# Altium PCB PADS_1.PcbDoc
Units mil, origin at the board's own origin, x right, y up, seen from the top; angles counter-clockwise.
Board outline 6102.36 x 3681.1 mil, 2 copper layers (Top Layer, Bottom Layer); 115 components, 68 nets, 289 pads, 69 vias.
Unrouted connection lines stored in the file: 1.
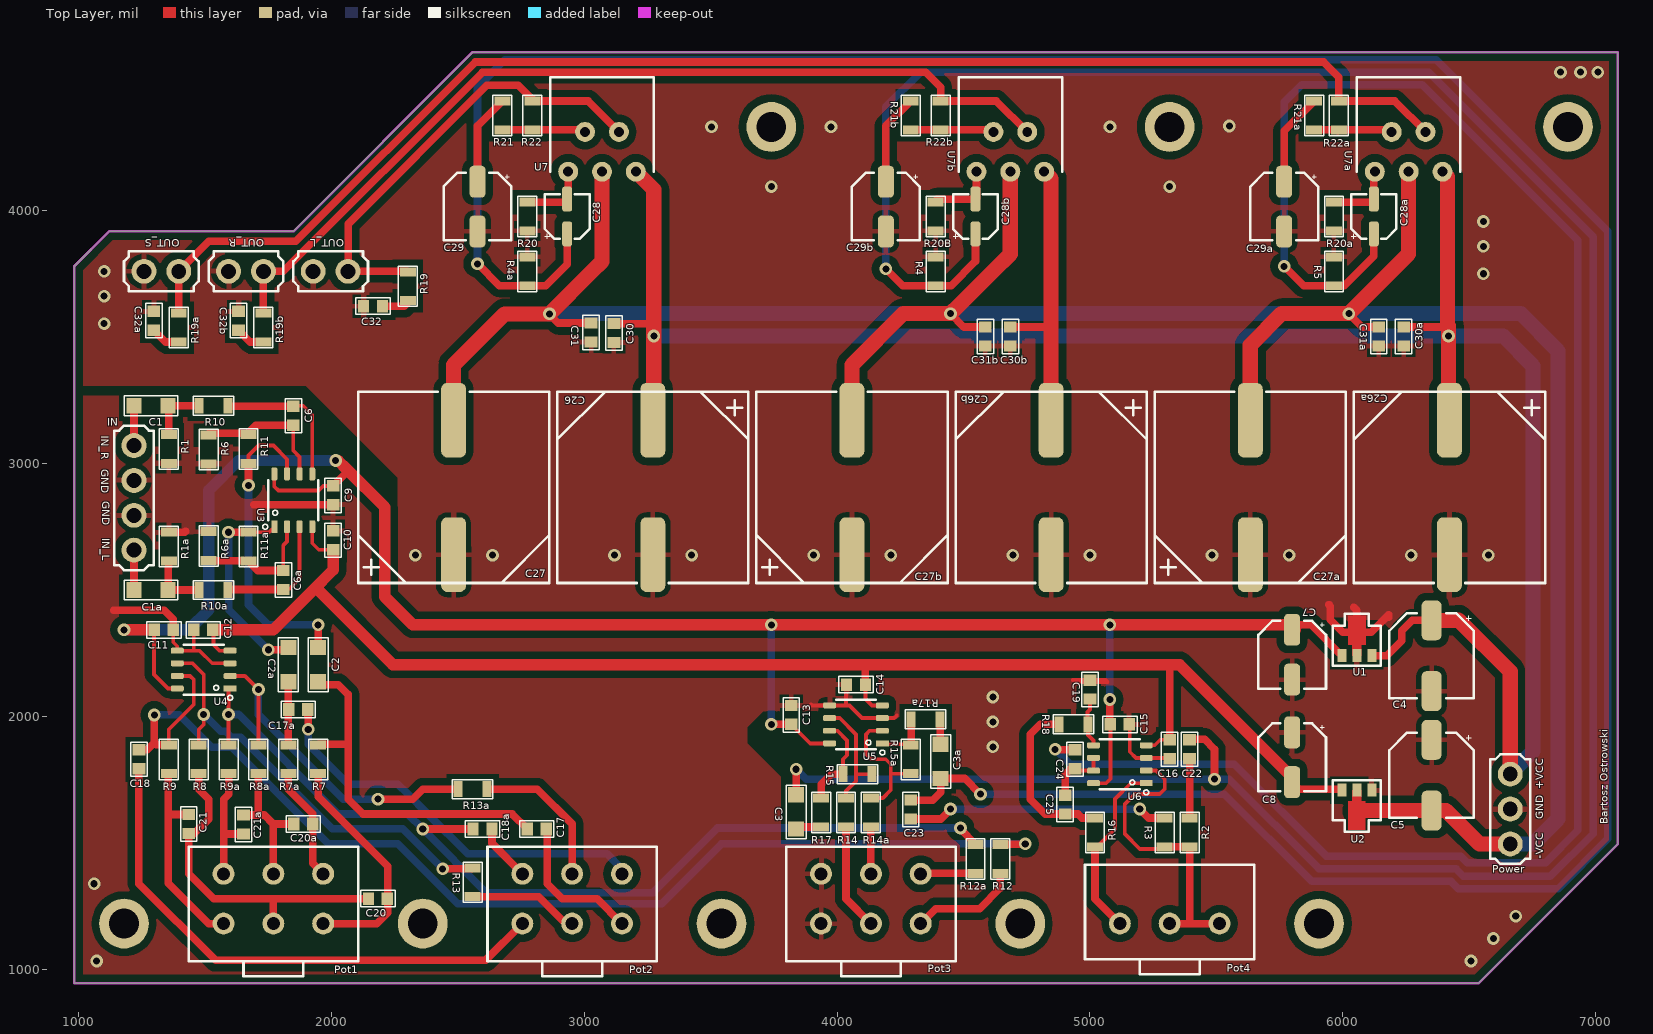
[diagram p0: Top Layer view]
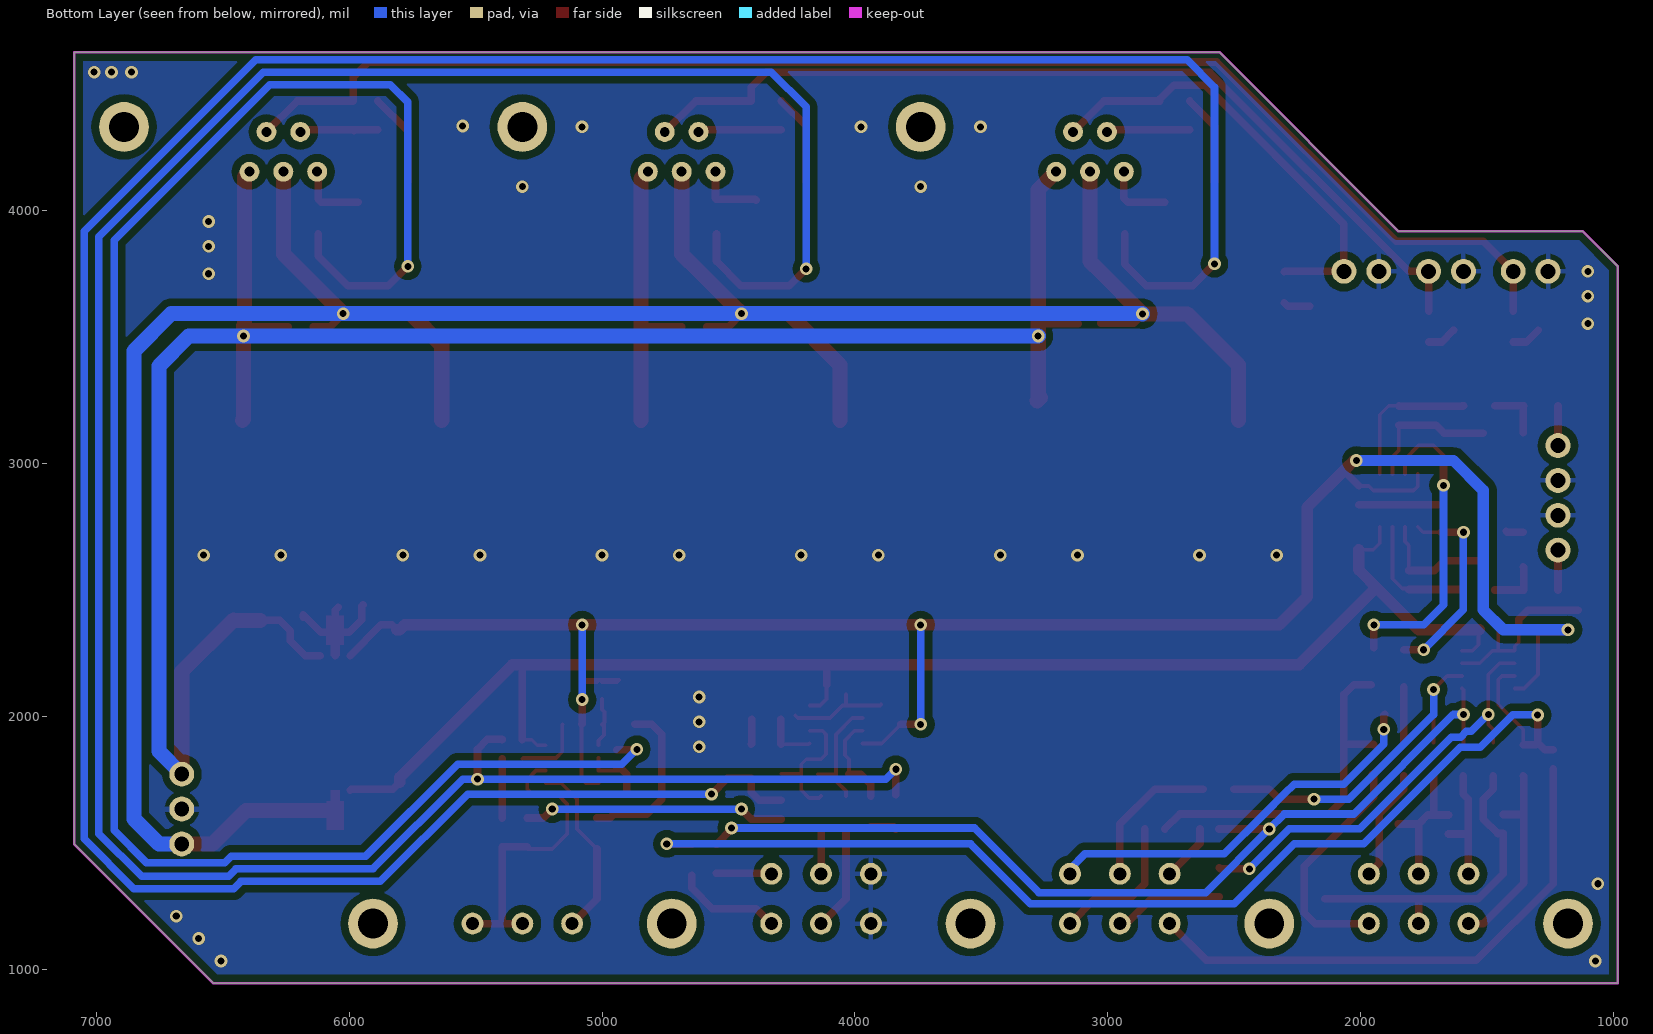
[diagram p1: Bottom Layer view, seen from below]

## Layer stack, top to bottom
Top Solder: solder mask 0.4, Solder Resist, Dk 3.5
Top Layer: signal copper 1.4
Dielectric 1: dielectric 12.6, FR-4, Dk 4.8
Bottom Layer: signal copper 1.4
Bottom Solder: solder mask 0.4, Solder Resist, Dk 3.5

## Board outline
984.25,944.88 984.25,3779.53 1122.05,3917.32 1850.39,3917.32 2559.06,4625.98 7086.61,4625.98 7086.61,1496.06 6535.43,944.88

## Design rules (kind name [scope] priority, off if disabled: settings)
Clearance [All] p1: gap=10 ignorepadtopadclearanceinfootprint=FALSE except(30: Arc-Poly Track-Poly SMDPad-Poly THPad-Poly Via-Poly Fill-Poly Poly-Poly)
PolygonConnect [All] p1: thpad.connectstyle=Relief thpad.reliefconductorwidth=20 thpad.reliefentries=4 thpad.polygonreliefangle="90 Angle" thpad.airgapwidth=20 smdpad.connectstyle=Relief smdpad.reliefconductorwidth=20 smdpad.reliefentries=4 smdpad.polygonreliefangle="90 Angle" smdpad.airgapwidth=20 via.connectstyle=Relief via.reliefconductorwidth=20 via.reliefentries=4 via.polygonreliefangle="90 Angle" via.airgapwidth=0
RoutingVias [All] p1: holewidth=28 width=50 viastyle="Through Hole" minholewidth=28 minwidth=50 maxholewidth=28 maxwidth=50
SolderMaskExpansion [All] p1: expansion=4 istentingtop=FALSE
Width [All] p1: maxlimit=60 minlimit=15 preferedwidth=30
30 further rules are at their usual default settings.

## Components (designator, comment, footprint, x,y, rotation, side; value= is the part's Value field where it differs from the comment)
C1 "Capacitor" "CAP SMD 3.2x1.6x1.6" 1287.97,3228.35 r0 top value=1uF
C1a "Capacitor" "CAP SMD 3.2x1.6x1.6" 1287.97,2500 r0 top value=1uF
C2 "Capacitor" "CAP SMD 3.2x1.6x1.6" 1948.82,2204.72 r270 top value=1uF
C2a "Capacitor" "CAP SMD 3.2x1.6x1.6" 1830.71,2204.72 r270 top value=1uF
C3 "Capacitor" "CAP SMD 3.2x1.6x1.6" 3838.58,1622.62 r90 top value=1uF
C3a "Capacitor" "CAP SMD 3.2x1.6x1.6" 4409.45,1822.26 r270 top value=1uF
C4 "Capacitor_Pol" CAP_POL_SMD_8.5x8.5x10.7 6350.39,2240.16 r180 top value=100uF
C5 "Capacitor_Pol" CAP_POL_SMD_8.5x8.5x10.7 6350.39,1767.72 r180 top value=100uF
C6 "Capacitor" "CAP SMD 2x1.25x1.25" 1850.39,3188.98 r270 top value=10pF
C6a "Capacitor" "CAP SMD 2x1.25x1.25" 1811.02,2539.37 r90 top value=10pF
C7 "Capacitor_Pol" CAP_POL_SMD_6.8x6.8x8 5799.21,2244.09 r180 top value=47uF
C8 "Capacitor_Pol" CAP_POL_SMD_6.8x6.8x8 5799.21,1838.58 r180 top value=47uF
C9 "Capacitor" "CAP SMD 2x1.25x1.25" 2007.87,2874.02 r270 top value=100nF
C10 "Capacitor" "CAP SMD 2x1.25x1.25" 2007.87,2696.85 r90 top value=100nF
C11 "Capacitor" "CAP SMD 2x1.25x1.25" 1338.58,2342.52 r0 top value=100nF
C12 "Capacitor" "CAP SMD 2x1.25x1.25" 1494.19,2342.52 r180 top value=100nF
C13 "Capacitor" "CAP SMD 2x1.25x1.25" 3818.9,2006 r90 top value=100nF
C14 "Capacitor" "CAP SMD 2x1.25x1.25" 4074.8,2125.98 r180 top value=100nF
C15 "Capacitor" "CAP SMD 2x1.25x1.25" 5118.11,1968.5 r0 top value=100nF
C16 "Capacitor" "CAP SMD 2x1.25x1.25" 5314.96,1870.08 r270 top value=100nF
C17 "Capacitor" "CAP SMD 2x1.25x1.25" 2813.09,1555.12 r0 top value=4.7nF
C17a "Capacitor" "CAP SMD 2x1.25x1.25" 1870.08,2027.56 r0 top value=4.7nF
C18 "Capacitor" "CAP SMD 2x1.25x1.25" 1240.16,1830.71 r90 top value=4.7nF
C18a "Capacitor" "CAP SMD 2x1.25x1.25" 2598.43,1555.12 r180 top value=4.7nF
C19 "Capacitor" "CAP SMD 2x1.25x1.25" 5000,2106.3 r90 top value=220nF
C20 "Capacitor" "CAP SMD 2x1.25x1.25" 2185.04,1279.53 r0 top value=33nF
C20a "Capacitor" "CAP SMD 2x1.25x1.25" 1889.76,1574.8 r0 top value=33nF
C21 "Capacitor" "CAP SMD 2x1.25x1.25" 1437.01,1574.8 r270 top value=33nF
C21a "Capacitor" "CAP SMD 2x1.25x1.25" 1653.54,1572.93 r90 top value=33nF
C22 "Capacitor" "CAP SMD 2x1.25x1.25" 5393.7,1870.08 r90 top value=220nF
C23 "Capacitor" "CAP SMD 2x1.25x1.25" 4291.34,1631.99 r270 top value=220nF
C24 "Capacitor" "CAP SMD 2x1.25x1.25" 4940.94,1830.71 r90 top value=220nF
C25 "Capacitor" "CAP SMD 2x1.25x1.25" 4901.57,1651.67 r90 top value=22nF
C26 "Capacitor_Pol" Panasonic_K16_BO 3271.65,2905.51 r180 top value=2200uF
C26a "Capacitor_Pol" Panasonic_K16_BO 6421.26,2905.51 r180 top value=2200uF
C26b "Capacitor_Pol" Panasonic_K16_BO 4846.46,2905.51 r180 top value=2200uF
C27 "Capacitor_Pol" Panasonic_K16_BO 2484.25,2905.51 r0 top value=2200uF
C27a "Capacitor_Pol" Panasonic_K16_BO 5633.86,2905.51 r0 top value=2200uF
C27b "Capacitor_Pol" Panasonic_K16_BO 4059.06,2905.51 r0 top value=2200uF
C28 "Capacitor_Pol" CAP_POL_SMD_4.5x4.5x6 2933.07,3976.38 r0 top value=1uF
C28a "Capacitor_Pol" CAP_POL_SMD_4.5x4.5x6 6122.05,3976.38 r0 top value=1uF
C28b "Capacitor_Pol" CAP_POL_SMD_4.5x4.5x6 4547.24,3976.38 r0 top value=1uF
C29 "Capacitor_Pol" CAP_POL_SMD_6.8x6.8x6 2578.74,4015.75 r180 top value=22uF
C29a "Capacitor_Pol" CAP_POL_SMD_6.8x6.8x6 5767.72,4015.75 r180 top value=22uF
C29b "Capacitor_Pol" CAP_POL_SMD_6.8x6.8x6 4192.91,4015.75 r180 top value=22uF
C30 "Capacitor" "CAP SMD 2x1.25x1.25" 3118.11,3515.75 r270 top value=100nF
C30a "Capacitor" "CAP SMD 2x1.25x1.25" 6240.16,3502.07 r270 top value=100nF
C30b "Capacitor" "CAP SMD 2x1.25x1.25" 4685.04,3502.07 r270 top value=100nF
C31 "Capacitor" "CAP SMD 2x1.25x1.25" 3027.56,3517.82 r270 top value=100nF
C31a "Capacitor" "CAP SMD 2x1.25x1.25" 6141.73,3502.07 r270 top value=100nF
C31b "Capacitor" "CAP SMD 2x1.25x1.25" 4586.61,3502.07 r270 top value=100nF
C32 "Capacitor" "CAP SMD 2x1.25x1.25" 2165.35,3622.05 r0 top value=470uF
C32a "Capacitor" "CAP SMD 2x1.25x1.25" 1299.21,3564.86 r270 top value=470uF
C32b "Capacitor" "CAP SMD 2x1.25x1.25" 1633.86,3564.86 r270 top value=470uF
IN "" "quad solder pad" 1220.47,3070.87 r0 top
OUT_L "?" "double solder pad" 2066.93,3759.84 r270 top
OUT_R "?" "double solder pad" 1732.28,3759.84 r270 top
OUT_S "?" "double solder pad" 1397.64,3759.84 r270 top
Pot1 "?" PDB182-K_BO 1771.65,1031.5 r0 top
Pot2 "?" PDB182-K_BO 2952.76,1031.5 r0 top
Pot3 "?" PDB182-K_BO 4133.86,1031.5 r0 top
Pot4 "" PDB181-K_BO 5314.96,1039.37 r0 top
Power "?" "tripple solder pad" 6661.42,1771.65 r0 top
R1 "" RES_SMD_3.1x1.6x0.6 1358.27,3057.09 r90 top value=100k
R1a "" RES_SMD_3.1x1.6x0.6 1358.27,2671.26 r270 top value=100k
R2 "" RES_SMD_3.1x1.6x0.6 5393.7,1541.34 r270 top value=100k
R3 "" RES_SMD_3.1x1.6x0.6 5295.28,1541.34 r90 top value=100k
R4 "" RES_SMD_3.1x1.6x0.6 4389.76,3759.84 r90 top value=100k
R4a "" RES_SMD_3.1x1.6x0.6 2775.59,3759.84 r90 top value=100k
R5 "" RES_SMD_3.1x1.6x0.6 5964.57,3759.84 r90 top value=100k
R6 "" RES_SMD_3.1x1.6x0.6 1515.75,3055.12 r270 top value=10k
R6a "" RES_SMD_3.1x1.6x0.6 1515.75,2673.23 r90 top value=10k
R7 "" RES_SMD_3.1x1.6x0.6 1948.82,1830.71 r90 top value=10k
R7a "" RES_SMD_3.1x1.6x0.6 1830.71,1830.71 r90 top value=10k
R8 "" RES_SMD_3.1x1.6x0.6 1476.38,1830.71 r270 top value=10k
R8a "" RES_SMD_3.1x1.6x0.6 1712.6,1830.71 r270 top value=10k
R9 "" RES_SMD_3.1x1.6x0.6 1358.27,1830.71 r270 top value=10k
R9a "" RES_SMD_3.1x1.6x0.6 1594.49,1830.71 r270 top value=10k
R10 "" RES_SMD_3.1x1.6x0.6 1535.43,3228.35 r180 top value=1k
R10a "" RES_SMD_3.1x1.6x0.6 1535.43,2500 r180 top value=1k
R11 "" RES_SMD_3.1x1.6x0.6 1673.23,3057.09 r90 top value=4.7k
R11a "" RES_SMD_3.1x1.6x0.6 1673.23,2671.26 r270 top value=4.7k
R12 "" RES_SMD_3.1x1.6x0.6 4645.67,1437.01 r90 top value=4.7k
R12a "" RES_SMD_3.1x1.6x0.6 4547.24,1437.01 r90 top value=4.7k
R13 "" RES_SMD_3.1x1.6x0.6 2559.05,1344.49 r270 top value=3.3k
R13a "" RES_SMD_3.1x1.6x0.6 2559.06,1712.6 r0 top value=3.3k
R14 "" RES_SMD_3.1x1.6x0.6 4035.43,1620.08 r270 top value=15k
R14a "" RES_SMD_3.1x1.6x0.6 4133.86,1620.08 r270 top value=15k
R15 "" RES_SMD_3.1x1.6x0.6 4080.71,1771.65 r0 top value=33k
R15a "" RES_SMD_3.1x1.6x0.6 4291.34,1830.71 r270 top value=33k
R16 "" RES_SMD_3.1x1.6x0.6 5019.69,1541.34 r270 top value=68k
R17 "" RES_SMD_3.1x1.6x0.6 3937.01,1620.08 r90 top value=100R
R17a "" RES_SMD_3.1x1.6x0.6 4350.39,1988.19 r180 top value=100R
R18 "" RES_SMD_3.1x1.6x0.6 4935.04,1968.5 r180 top value=150k
R19 "" RES_SMD_3.1x1.6x0.6 2303.15,3700.79 r90 top value=2.2R
R19a "" RES_SMD_3.1x1.6x0.6 1397.64,3537.4 r90 top value=2.2R
R19b "" RES_SMD_3.1x1.6x0.6 1732.28,3537.4 r90 top value=2.2R
R20 "" RES_SMD_3.1x1.6x0.6 2775.59,3976.38 r270 top value=22k
R20a "" RES_SMD_3.1x1.6x0.6 5964.57,3976.38 r270 top value=22k
R20B "" RES_SMD_3.1x1.6x0.6 4389.76,3976.38 r270 top value=22k
R21 "" RES_SMD_3.1x1.6x0.6 2677.17,4375.98 r90 top value=680R
R21a "" RES_SMD_3.1x1.6x0.6 5885.83,4375.98 r90 top value=680R
R21b "" RES_SMD_3.1x1.6x0.6 4291.34,4375.98 r90 top value=680R
R22 "" RES_SMD_3.1x1.6x0.6 2795.28,4375.98 r270 top value=22k
R22a "" RES_SMD_3.1x1.6x0.6 5984.25,4375.98 r90 top value=22k
R22b "" RES_SMD_3.1x1.6x0.6 4409.45,4375.98 r270 top value=22k
U1 "78L15" SOT89 6055.12,2240.16 r0 top
U2 "79L15" SOT89 6055.12,1708.66 r180 top
U3 "NA5532" SOT96-1 1850.39,2854.33 r0 top
U4 "NA5532" SOT96-1 1496.06,2185.04 r90 top
U5 "NA5532" SOT96-1 4074.8,1968.5 r90 top
U6 "NA5532" SOT96-1 5118.11,1811.02 r90 top
U7 "TDA2050" TO-22B_BO 3070.87,4153.54 r0 top
U7a "TDA2050" TO-22B_BO 6259.84,4153.54 r0 top
U7b "TDA2050" TO-22B_BO 4685.04,4153.54 r0 top

## Footprints (in the part's own frame and the unit in brackets; to place one, negate y for a bottom-side part, rotate by r counter-clockwise, add the part's x,y. Pads: shape width x height; smd on the part's side, far side on the other; paste and mask are expansions set on the pad)
"CAP SMD 2x1.25x1.25" [mil]
  rect 45x50 smd: 1(-37.5,0) 2(37.5,0)
  Top Layer pour cut-out: -14.76,32.48 14.76,32.48 14.76,-32.48 -14.76,-32.48
  silkscreen extent -68,-32 68,32, body extent -39,-25 39,25, height 49
"CAP SMD 3.2x1.6x1.6" [mil]
  rect 60x63 smd: 1(-67.5,0) 2(67.5,0)
  Top Layer pour cut-out: -36.42,39.37 35.43,39.37 36.42,38.39 36.42,-39.37 -36.42,-39.37
  silkscreen extent -106,-39 106,39, body extent -63,-31 63,31, height 63
CAP_POL_SMD_4.5x4.5x6 [mm]
  rrect50% 1x2.5 smd: 1(0,-1.75) 2(0,1.75)
  silkscreen extent -2.25,-2.25 2.25,2.25, body extent -2.28,-2.75 2.25,2.75, height 6
CAP_POL_SMD_6.8x6.8x6 [mm]
  rrect50% 1.6x3.2 smd: 1(0,-2.5) 2(0,2.5)
  silkscreen extent -3.4,-3.4 3.4,3.4, body extent -3.4,-3.9 3.4,3.9, height 6
CAP_POL_SMD_6.8x6.8x8 [mm]
  rrect50% 1.6x3.2 smd: 1(0,-2.5) 2(0,2.5)
  silkscreen extent -3.4,-3.4 3.4,3.4, body extent -3.4,-3.9 3.4,3.9, height 8
CAP_POL_SMD_8.5x8.5x10.7 [mm]
  rrect50% 2x4 smd: 1(0,-3.55) 2(0,3.55)
  silkscreen extent -4.25,-4.25 4.25,4.25, body extent -4.3,-5 4.25,5, height 10.8
"double solder pad" [mm]
  round 2.5 hole 1.5: 1(0,0) 2(0,-3.5)
  silkscreen extent -2,-5.5 2,2
Panasonic_K16_BO [mm]
  rrect50% 2.5x7.5 smd: 1(0,-6.75) 2(0,6.75)
  silkscreen extent -9.6,-9.6 9.6,9.6, body extent -9.6,-10.5 9.6,10.5, height 17.2
PDB181-K_BO [mm]
  round 2.2 hole 1.3: 1(-5,3.6) 2(0,3.6) 3(5,3.6)
  silkscreen extent -8.5,-1.5 8.5,9.5, body extent -8.38,-15.03 8.38,9.1, height 21.88
PDB182-K_BO [mm]
  round 2.2 hole 1.3: 1(-5,3.8) 2(0,3.8) 3(5,3.8) 4(-5,8.8) 5(0,8.8) 6(5,8.8)
  silkscreen extent -8.5,-1.5 8.5,11.5, body extent -8.5,-20 8.5,11, height 22.05
"quad solder pad" [mm]
  round 2.5 hole 1.5: 1(0,0) 2(0,-3.5) 3(0,-7) 4(0,-10.5)
  silkscreen extent -2,-12.5 2,2
RES_SMD_3.1x1.6x0.6 [mm]
  rect 0.9x1.6 smd: 1(-1.45,0) 2(1.45,0)
  Top Layer pour cut-out: -1.05,0.95 -1.05,-0.95 1.05,-0.95 1.05,0.95
  silkscreen extent -2.03,-0.95 2.03,0.95, body extent -1.55,-0.8 1.55,0.8, height 0.6
SOT89 [mm]
  rect 0.9x1.3 smd: 1(-1.5,0) 2(0,0) 3(1.5,0)
  Top Layer region: -0.854,1.1 0.88,1.1 0.88,4 -0.854,4
  Top Layer region: -0.45,1.1 -0.45,0 0.45,0 0.45,1.1
  silkscreen extent -2.4,-1 2.4,4.2, body extent -2.25,-0.5 2.25,3.75, height 1.54
SOT96-1 [mm]
  rect 0.6x1.3 smd: 1(-1.905,-2.65)
  rrect50% 0.6x1.3 smd: 2(-0.635,-2.65) 3(0.635,-2.65) 4(1.905,-2.65) 5(1.905,2.65) 6(0.635,2.65) 7(-0.635,2.65) 8(-1.905,2.65)
  Top Layer pour cut-out: -2.5,2.007 2.5,2.007 2.5,-2.007 -2.5,-2.007
  Top Layer pour cut-out: -1.27,2.794 1.27,2.794 1.27,-2.667 -1.27,-2.667
  silkscreen extent -3.07,-2.9 2.5,2, body extent -2.45,-3.02 2.45,3.02, height 1.65
TO-22B_BO [mm]
  round 2 hole 1: 1(-3.4,0) 2(-1.7,4) 3(0,0) 4(1.7,4) 5(3.4,0)
  silkscreen extent -5.2,0 5.2,9.5, body extent -5.08,-0.2 5.08,8.3, height 20.05
"tripple solder pad" [mm]
  round 2.5 hole 1.5: 1(0,0) 2(0,-3.5) 3(0,-7)
  silkscreen extent -2,-9 2,2

## Part data
IN: library part "Quad solder pad"
OUT_L OUT_R OUT_S: library part "Double solder pad"
Pot1 Pot2 Pot3: library part BOURNS_PDB182-K, =100k
Pot4: library part BOURNS_PDB181-K, =220k
Power: library part "Tripple solder pad"
R1 R1a R2 R3 R4 R4a R5 R6 R6a R7 R7a R8 R8a R9 R9a R10 R10a R11 R11a R12 R12a R13 R13a R14 R14a R15 R15a R16 R17 R17a R18 R19 R19a R19b R20 R20a R20B R21 R21a R21b R22 R22a R22b: library part Res1, "Resistor", LatestRevisionDate=17-Jul-2002, LatestRevisionNote="Re-released for DXP Platform.", PackageDescription="Axial Device, Thru-Hole; 2 Leads; 0.3 in Pin Spacing", PackageReference=AXIAL-0.3, Published=8-Jun-2000, Publisher="Altium Limited"

## Free pads (board coordinates)
  round 196.85 hole 118.11: mh(1181.1,1181.1) mh(2362.2,1181.1) mh(3543.31,1181.1) mh(3740.16,4330.71) mh(4724.41,1181.1) mh(5314.96,4330.71) mh(5905.51,1181.1) mh(6889.76,4330.71)

## Via types
v1: diameter 50, hole 28, Top Layer to Bottom Layer, 69 vias

## Nets (pads, with @x,y where several pads share a name; then routed paths per layer and width w, separated by ;. In a path a pad name is that pad's centre, name@x,y a point inside that pad or via, vN(x,y) a via of type N, cw(c..) or ccw(c..) an arc to the next point about the centre after c; other vN are vias at no path point)
15V: C7.1 C9.1 C11.1 C13.1 C15.1 U1.1 U3.8 U4.8 U5.8 U6.8 | length 8027.5
  Top Layer w15: C11.1@1299.21,2322.83 1299.21,2165.35 1354.53,2110.04 U4.8 ; U3.8 1775.39,2909.65 1791.34,2893.7 1950.69,2893.7 1968.5,2911.52 C9.1 ; C13.1 3893.9,1893.5 U5.8 ; U6.8 5062.8,1736.02 5080.61,1753.84 C15.1
  Top Layer w30: C9.1 2062.01,2965.65 2062.01,2977.36 ; v1(3740.16,1968.5) C13.1 ; v1(5078.74,2066.93) 5078.74,1970.37 C15.1 ; C7.1@5811.02,2342.52 5830.71,2362.2 5874.02,2362.2 U1.1
  Top Layer w45: v1(1181.1,2342.52) C11.1 ; v1(2017.72,3011.81) 2027.56,3011.81 2062.01,2977.36 2211.61,2827.76 2211.61,2473.43 2322.83,2362.2 v1(3740.16,2362.2) v1(5078.74,2362.2) 5779.53,2362.2 C7.1 C7.1@5811.02,2342.52
  Bottom Layer w30: v1(3740.16,1968.5) v1(3740.16,2362.2) ; v1(5078.74,2066.93) v1(5078.74,2362.2)
  Bottom Layer w45: v1(1181.1,2342.52) 1437.01,2342.52 1515.75,2421.26 1515.75,2893.7 1633.86,3011.81 v1(2017.72,3011.81)
+VCC: C4.1 C26.1 C26a.1 C26b.1 C30.1 C30a.1 C30b.1 Power.1 U1.3 U7.5 U7a.5 U7b.5 | length 9730.7
  Top Layer w30: C30.1 3269.59,3553.25 3275.59,3547.24 ; C30b.1 4830.51,3539.57 4846.46,3523.62 ; U1.3 6173.23,2240.16 6232.28,2299.21 6232.28,2338.58 6273.62,2379.92 C4.1 ; C30a.1 6413.58,3539.57
  Top Layer w60: U7.5 3275.59,4082.68 3275.59,3547.24 v1@3275.59,3504.92 ; v1@3274.61,3504.92 v1(3275.59,3503.94) 3275.59,3267.72 3267.72,3259.84 C26.1@3279.53,3248.03 ; U7b.5 4846.46,4125.98 4846.46,3523.62 C26b.1 ; C4.1 6454.72,2379.92 6456.69,2381.89 6661.42,2177.17 Power.1 ; U7a.5 6413.58,4133.66 6413.58,3539.57 ; 6417.32,3543.31 v1(6417.32,3503.94) 6417.32,3175.2 C26a.1
  Bottom Layer w60: v1(3275.59,3503.94) v1(6417.32,3503.94) 6633.86,3503.94 6751.97,3385.83 6751.97,1862.21 Power.1
-15V: C8.2 C10.1 C12.1 C14.1 C16.1 U2.3 U3.4 U4.4 U5.4 U6.4 | length 5971
  Top Layer w15: 1555.12,2340.65 1535.43,2320.96 1535.43,2283.46 1558.86,2260.04 U4.4 ; U3.4 1925.39,2684.65 1950.69,2659.35 C10.1 ; C14.1 4112.3,2068.8 4137.6,2043.5 U5.4 ; U6.4 5256.1,1886.02 5277.66,1907.58 C16.1
  Top Layer w30: C14.1 4112.3,2204.72 ; C16.1 5314.96,2204.72 ; C8.2 5826.77,1712.6 5992.13,1712.6 U2.3
  Top Layer w45: C12.1 1771.65,2342.52 1929.13,2500 ; C10.1 2007.87,2578.74 1929.13,2500 ; C8.2 5799.21,1759.84 5354.33,2204.72 5314.96,2204.72 4112.3,2204.72 2244.09,2204.72 1948.82,2500 1929.13,2500
-VCC: C5.2 C27.2 C27a.2 C27b.2 C31.1 C31a.1 C31b.1 Power.3 U2.2 U7.3 U7a.3 U7b.3 | length 11369.5
  Top Layer w30: v1(2863.19,3591.54) 2863.19,3589.57 2897.44,3555.32 C31.1 ; 3031.5,3757.97 3031.5,3759.84 ; v1(4448.82,3592.52) 4501.77,3539.57 C31b.1 ; 4483.27,3626.97 4499.21,3626.97 ; 4616.14,3759.84 4622.24,3759.84 ; v1(6023.62,3592.52) 6076.57,3539.57 C31a.1
  Top Layer w60: C27.2 2484.25,3389.76 2686.02,3591.54 v1(2863.19,3591.54) 3031.5,3759.84 3070.87,3799.21 U7.3 ; C27b.2 4059.06,3389.76 4261.81,3592.52 v1(4448.82,3592.52) 4483.27,3626.97 4616.14,3759.84 4685.04,3828.74 U7b.3 ; C27a.2 5633.86,3468.5 5757.87,3592.52 v1(6023.62,3592.52) 6259.84,3828.74 U7a.3 ; 6057.09,1627.95 C5.2 6407.48,1627.95 6539.37,1496.06 Power.3
  Bottom Layer w60: v1(2863.19,3591.54) 2864.17,3592.52 v1(4448.82,3592.52) v1(6023.62,3592.52) 6702.76,3592.52 6850.39,3444.88 6850.39,1594.49 6751.97,1496.06 Power.3
GND: C4.2 C5.1 C7.2 C8.1 C9.2 C10.2 C11.2 C12.2 C13.2 C14.2 C15.2 C16.2 C19.2 C26.2 C26a.2 C26b.2 C27.1 C27a.1 C27b.1 C29.2 C29a.2 C29b.2 C30.2 C30a.2 C30b.2 C31.2 C31a.2 C31b.2 C32.1 C32a.1 C32b.1 IN.2 IN.3 OUT_L.2 OUT_R.2 OUT_S.2 Pot3.1 Pot3.4 Power.2 R1.1 R1a.1 R4.2 R4a.2 R5.2 R6.2 R6a.2 R20.2 R20a.2 R20B.2 U1.2 U2.1 U4.3 U4.5 U5.3 U5.5 U6.3 | length 2578
  Top Layer w15: C11.2 1376.08,2293.21 1391.73,2277.56 U4.5 1456.69,2260.04 ; C12.2 1456.69,2260.04 ; U4.3 1530.12,2210.04 1480.12,2260.04 1456.69,2260.04 ; 3897.64,2047.24 3901.38,2043.5 U5.5 4035.43,2043.5 ; 4035.43,2086.61 4035.43,2043.5 ; 4236.22,2003.94 4225.79,1993.5 U5.3 4099.02,1993.5 4049.02,2043.5 4035.43,2043.5 ; C19.2@5000,2135.83 4940.94,2135.83 4932.97,2143.8 C19.2 C19.2@5011.71,2143.8 ; C15.2 5157.48,1966.63 5157.48,1860.24 5181.69,1836.02 U6.3 5311.52,1836.02 C16.2 ; C19.2@5011.71,2143.8 5019.69,2135.83 5068.9,2135.83 5060.93,2143.8 C19.2@5011.71,2143.8
  Top Layer w30: 1139.86,2419.39 1340.45,2419.39 1376.08,2383.76 C11.2 ; R1a.1 1421.26,2728.35 1425.2,2732.28 ; 1694.78,2836.52 C9.2 ; 5944.88,2440.94 5949.8,2436.02 5949.8,2381.89 5999.02,2332.68 6055.12,2332.68 ; 6043.31,2431.1 6055.12,2419.29 6055.12,2332.68 ; U1.2 6055.12,2332.68 ; 6181.1,2391.73 6181.1,2401.57 6112.2,2332.68 6055.12,2332.68
  other v1: 1072.83,1033.46 6506.06,1033.31 6594.49,1122.05 6683.07,1210.63 1062.99,1338.58 4616.14,1879.92 4616.14,1978.35 4616.14,2076.77 2332.68,2637.8 2637.8,2637.8 3120.08,2637.8 3425.2,2637.8 3907.48,2637.8 4212.6,2637.8 4694.88,2637.8 5000,2637.8 5482.28,2637.8 5787.4,2637.8 6269.69,2637.8 6574.8,2637.8 1102.36,3553.15 1102.36,3661.42 6555.12,3750 1102.36,3759.84 6555.12,3858.27 6555.12,3956.69 3740.16,4094.49 5314.96,4094.49 3503.94,4330.71 3976.38,4330.71 5078.9,4330.87 5551.02,4334.41 6860.24,4547.24 6938.98,4547.24 7007.87,4547.24
InL: C1a.1 IN.4 | length 157.5
  Top Layer w30: C1a.1 IN.4
InR: C1.1 IN.1 | length 157.5
  Top Layer w30: IN.1 C1.1
NetC1_2: C1.2 R1.2 R10.2 | length 222.5
  Top Layer w30: R1.2@1358.27,3122.05 1358.27,3225.55 C1.2 R10.2@1470.47,3228.35
NetC1a_2: C1a.2 R1a.2 R10a.2 | length 208.7
  Top Layer w30: 1358.27,2592.52 1355.47,2589.72 C1a.2 R10a.2@1470.47,2500
NetC2_1: C2.1 R11.1 U3.7 | length 1237.9
  Top Layer w15: R11.1@1673.23,2992.13 R11.1 1673.23,3031.5 1712.6,3070.87 1771.65,3070.87 1825.39,3017.13 U3.7
  Top Layer w30: v1(1673.23,2913.39) R11.1@1673.23,2992.13 ; C2.1 v1(1948.82,2362.2)
  Bottom Layer w30: v1(1673.23,2913.39) 1673.23,2440.94 1751.97,2362.2 v1(1948.82,2362.2)
NetC2_2: C2.2 C17.1 R7.2 | length 1413.1
  Top Layer w30: R7.2 1950.79,1889.76 2066.93,1889.76 ; C2.2@1960.06,2125.98 2027.56,2125.98 2066.93,2086.61 2066.93,1889.76 ; C17.1 2716.54,1614.17 2125.98,1614.17 2066.93,1673.23 2066.93,1889.76
NetC2a_1: C2a.1 R11a.1 U3.1 | length 798.4
  Top Layer w15: R11a.1@1681.1,2728.35 1753.74,2728.35 U3.1
  Top Layer w30: v1(1594.49,2728.35) R11a.1@1681.1,2728.35 ; v1(1751.97,2263.78) C2a.1@1830.71,2263.78
  Bottom Layer w30: v1(1594.49,2728.35) 1594.49,2421.26 v1(1751.97,2263.78)
NetC2a_2: C2a.2 C17a.1 R7a.2 | length 221.9
  Top Layer w30: R7a.2@1830.71,1895.67 C2a.2@1830.71,2117.54
NetC3_1: C3.1 R17.1 | length 101.7
  Top Layer w30: C3.1 3846.46,1562.99 R17.1
NetC3_2: C3.2 C22.2 C28b.1 R4.1 | length 10377
  Top Layer w30: C3.2 v1(3838.58,1791.34) ; v1(4192.91,3769.68) 4259.84,3702.76 R4.1 ; R4.1@4395.67,3702.76 4450.79,3702.76 4547.24,3799.21 C28b.1 ; C22.2 5395.57,1909.45 5452.76,1909.45 5492.13,1870.08 v1(5492.13,1751.97)
  Bottom Layer w30: v1(3838.58,1791.34) 3877.95,1751.97 v1(5492.13,1751.97) 5551.18,1751.97 5905.51,1397.64 6446.85,1397.64 6476.38,1368.11 6820.3,1368.11 6988.82,1536.63 6988.82,3897.01 6338.58,4547.24 4330.71,4547.24 4192.91,4409.45 v1(4192.91,3769.68)
NetC3a_1: C3a.1 R17a.1 | length 99.2
  Top Layer w30: R17a.1 4407.48,1891.73 C3a.1
NetC3a_2: C3a.2 C23.1 C28.1 R4a.1 | length 11524.9
  Top Layer w30: v1(2578.74,3789.37) 2665.35,3702.76 R4a.1 2848.43,3702.76 2933.07,3787.4 C28.1 ; C23.1 4378.15,1669.49 4409.45,1700.79 C3a.2 4505.08,1754.76 v1(4566.93,1692.91)
  Bottom Layer w30: v1(2578.74,3789.37) 2578.74,4488.19 2686.54,4595.98 6368.58,4595.98 7047.24,3917.32 7047.24,1515.75 6850.39,1318.9 6456.69,1318.9 6427.17,1348.43 5875.98,1348.43 5531.5,1692.91 v1(4566.93,1692.91)
NetC6_1: C6.1 R10.1 U3.5 | length 843
  Top Layer w15: R10.1@1600.39,3228.35 1848.52,3228.35 1889.76,3228.35 1925.39,3192.72 U3.5
  Top Layer w30: R10.1@1600.39,3228.35 R10.1 1594.39,3226.48 C6.1 C6.1@1848.52,3228.35
NetC6_2: C6.2 R6.1 R11.2 U3.6 | length 550.8
  Top Layer w15: C6.2 1850.39,3051.18 1875.39,3026.18 U3.6
  Top Layer w30: R6.1@1515.75,3120.08 1671.26,3120.08 1702.66,3151.48 C6.2
NetC6a_1: C6a.1 R10a.1 U3.3 | length 497.4
  Top Layer w15: C6a.1@1811.02,2505.31 1836.02,2505.31 1875.39,2544.69 U3.3
  Top Layer w30: R10a.1@1600.39,2500 1602.26,2501.87 C6a.1
NetC6a_2: C6a.2 R6a.1 R11a.2 U3.2 | length 490.6
  Top Layer w15: C6a.2 1811.02,2677.17 1825.39,2691.54 U3.2
  Top Layer w30: R6a.1 1671.26,2616.14 R11a.2 1710.53,2576.87 C6a.2
NetC17_2: C17.2 Pot2.3 | length 577
  Top Layer w30: C17.2@2854.33,1555.12 2854.33,1338.58 2913.39,1279.53 3051.18,1279.53 Pot2.3
NetC17a_2: C17a.2 Pot2.6 | length 1583.3
  Top Layer w30: C17a.2@1905.71,2007.87 1909.45,2004.13 v1(1909.45,1948.82)
  Bottom Layer w30: v1(1909.45,1948.82) 1909.45,1889.76 2066.93,1732.28 2263.78,1732.28 2302.12,1693.94 2382.92,1613.15 2539.37,1456.69 3090.55,1456.69 3149.61,1397.64 Pot2.6
NetC18_1: C18.1 Pot2.1 | length 2156.3
  Top Layer w30: C18.1 1240.16,1338.58 1543.31,1035.43 2610.24,1035.43 Pot2.1
NetC18_2: C18.2 R9.1 R12.2 U4.7 | length 4561.8
  Top Layer w15: R9.1 1358.27,1948.82 1456.69,2047.24 1456.69,2145.67 1442.32,2160.04 U4.7
  Top Layer w30: C18.2 1273.62,1868.21 1301.08,1895.67 ; v1(1301.08,2006.01) 1301.08,1895.67 ; R9.1 1308.96,1887.8 1301.08,1895.67 ; R12.2 4742.13,1494.09 v1(4744.09,1496.06)
  Bottom Layer w30: v1(1301.08,2006.01) 1399.51,2006.01 1527.56,1877.95 1606.3,1877.95 1988.19,1496.06 2263.78,1496.06 2500,1259.84 3307.09,1259.84 3543.31,1496.06 v1(4744.09,1496.06)
NetC18a_1: C18a.1 Pot2.4 | length 226.9
  Top Layer w30: C18a.1 2635.92,1497.93 Pot2.4
NetC18a_2: C18a.2 R9a.1 R12a.2 U4.1 | length 3803.9
  Top Layer w15: R9a.1 v1(1594.49,2007.87) 1594.49,2104.14 U4.1
  Top Layer w30: v1(2362.2,1555.12) C18a.2 ; v1(4488.19,1559.06) 4488.19,1553.15 R12a.2
  Bottom Layer w30: v1(1594.49,2007.87) 1633.86,2007.87 2027.56,1614.17 2303.15,1614.17 v1(2362.2,1555.12) 2613.54,1303.78 3272.28,1303.78 3527.56,1559.06 v1(4488.19,1559.06)
NetC19_1: C19.1 R18.1 U6.5 | length 199.9
  Top Layer w15: R18.1 4992.13,1927.17 5013.78,1905.51 U6.5 ; R18.1@5000,1968.5 4990.16,1978.35 4990.16,2017.72 5000,2027.56 C19.1
NetC20_1: C20.1 C21.2 Pot1.2 R8.2 | length 1295.4
  Top Layer w30: R8.2@1476.38,1765.75 1476.38,1712.6 1515.75,1673.23 1515.75,1594.49 1458.56,1537.3 C21.2 1437.01,1377.95 1476.38,1338.58 1535.43,1279.53 1535.91,1280 1770,1280 ; Pot1.2 1771.65,1278.35 1770,1280 ; C20.1@2142.5,1280 1770,1280
NetC20_2: C20.2 Pot1.3 R7.1 | length 948.1
  Top Layer w30: R7.1@1954.72,1771.65 1948.82,1765.75 1948.82,1683.07 2224.41,1407.48 2224.41,1224.41 2181.1,1181.1 Pot1.3 Pot1.3@1968.5,1191.5
NetC20a_1: C20a.1 C21a.2 Pot1.5 R8a.2 | length 565.6
  Top Layer w30: C21a.2 1712.6,1610.43 ; R8a.2@1712.6,1765.75 1712.6,1610.43 ; Pot1.5 1771.65,1574.8 ; C20a.1 1771.65,1574.8 ; 1712.6,1610.43 1736.02,1610.43 1771.65,1574.8
NetC20a_2: C20a.2 Pot1.6 R7a.1 | length 472.7
  Top Layer w15: Pot1.6 Pot1.6@1988.19,1397.64
  Top Layer w30: R7a.1@1830.71,1765.75 1830.71,1712.6 1927.26,1616.04 1927.26,1419.19 Pot1.6
NetC21_1: C21.1 Pot1.1 R9.2 | length 791.9
  Top Layer w30: R9.2@1358.27,1765.75 1356.4,1763.88 1356.4,1614.17 ; C21.1 1358.27,1612.3 1356.4,1614.17 ; Pot1.1 1515.75,1181.1 1356.4,1340.45 1356.4,1614.17
NetC21a_1: C21a.1 Pot1.4 R9a.2 | length 474.7
  Top Layer w30: Pot1.4 1574.8,1535.43 ; R9a.2@1594.49,1765.75 1594.49,1692.91 1574.8,1673.23 1574.8,1535.43 ; C21a.1 1574.8,1535.43
NetC22_1: C22.1 R2.1 | length 234.2
  Top Layer w30: R2.1 5393.7,1653.54 C22.1
NetC23_2: C23.2 R3.2 | length 1034.9
  Top Layer w30: C23.2 4409.45,1594.49 v1(4448.82,1633.86) ; v1(5196.85,1633.86) 5232.28,1598.43 R3.2
  Bottom Layer w30: v1(4448.82,1633.86) v1(5196.85,1633.86)
NetC24_1: C24.1 C25.2 U6.6 U6.7 | length 252.8
  Top Layer w15: C24.1 4948.13,1786.02 U6.7 U6.6
  Top Layer w30: C25.2@4901.57,1692.91 4901.57,1771.65 4923.13,1793.21 C24.1
NetC24_2: C24.2 C28a.1 R5.1 | length 7335.2
  Top Layer w30: v1(4862.2,1870.08) 4864.07,1868.21 C24.2 ; v1(5767.72,3779.53) 5844.49,3702.76 R5.1 6005.91,3702.76 6122.05,3818.9 C28a.1
  Bottom Layer w30: v1(4862.2,1870.08) 4921.26,1811.02 5570.87,1811.02 5935.04,1446.85 6466.54,1446.85 6491.54,1421.85 6800.84,1421.85 6929.13,1550.14 6929.13,3882.93 6314.03,4498.03 5836.61,4498.03 5767.72,4429.13 v1(5767.72,3779.53)
NetC25_1: C25.1 R16.1 R18.2 | length 665.4
  Top Layer w30: R18.2@4870.08,1968.5 4803.15,1968.5 4763.78,1929.13 4763.78,1673.23 4822.83,1614.17 C25.1 4952.76,1614.17 4968.5,1598.43 R16.1
NetC28_2: C28.2 R20.1 U7.1 | length 272.3
  Top Layer w30: R20.1 2921.26,4033.46 C28.2 2937.01,4049.21 U7.1
NetC28a_2: C28a.2 R20a.1 U7a.1 | length 272.3
  Top Layer w30: R20a.1 6110.24,4033.46 C28a.2 6122.05,4149.61 U7a.1
NetC28b_2: C28b.2 R20B.1 U7b.1 | length 269
  Top Layer w30: R20B.1@4389.76,4041.34 4393.7,4045.28 C28b.2 4551.18,4049.21 U7b.1
NetC29_1: C29.1 R21.2 | length 359.7
  Top Layer w30: C29.1 2578.74,4334.65 R21.2
NetC29a_1: C29a.1 R21a.2 | length 367.8
  Top Layer w30: C29a.1 5767.72,4314.96 R21a.2
NetC29b_1: C29b.1 R21b.2 | length 359.7
  Top Layer w30: C29b.1 4192.91,4334.65 R21b.2
NetC32_2: C32.2 R19.1 | length 106
  Top Layer w30: C32.2 2289.37,3622.05 R19.1@2303.15,3635.83
NetC32a_2: C32a.2 R19a.1 | length 117.9
  Top Layer w30: C32a.2 1346.26,3480.32 R19a.1
NetC32b_2: C32b.2 R19b.1 | length 117.9
  Top Layer w30: C32b.2 1680.91,3480.32 R19b.1
NetOUT_L_1: OUT_L.1 R19.2 R22.1 U7.4 | length 1795.6
  Top Layer w30: R19.2 2301.18,3759.84 OUT_L.1 2066.93,3946.85 2615.87,4495.79 2740.43,4495.79 R22.1@2795.28,4440.94 ; R22.1 3015.75,4433.07 U7.4
NetOUT_R_1: OUT_R.1 R19b.2 R22b.1 U7b.4 | length 3633.4
  Top Layer w30: R19b.2@1732.28,3602.36 OUT_R.1 1811.02,3759.84 2598.43,4547.24 4350.39,4547.24 4409.45,4488.19 R22b.1 4629.92,4433.07 U7b.4
NetOUT_S_1: OUT_S.1 R19a.2 R22a.2 U7a.4 | length 5599.1
  Top Layer w30: R19a.2@1397.64,3602.36 OUT_S.1 1515.75,3877.95 1860.24,3877.95 2569.53,4587.24 5924.57,4587.24 5984.25,4527.56 R22a.2 6204.72,4433.07 U7a.4
NetPot2_2: Pot2.2 R13.2 | length 437.7
  Top Layer w30: R13.2 2820.66,1287.4 2926.96,1181.1 Pot2.2
NetPot2_5: Pot2.5 R13a.2 | length 582.7
  Top Layer w30: R13a.2@2624.02,1712.6 2814.96,1712.6 2952.76,1574.8 Pot2.5
NetPot3_2: Pot3.2 R14.2 | length 414.8
  Top Layer w30: R14.2@4035.43,1555.12 4035.43,1279.53 Pot3.2
NetPot3_3: Pot3.3 R12.1 | length 423.5
  Top Layer w30: Pot3.3 4389.76,1240.16 4563.98,1240.16 4645.67,1321.85 R12.1@4645.67,1372.05
NetPot3_5: Pot3.5 R14a.2 | length 177.2
  Top Layer w30: Pot3.5 R14a.2@4133.86,1555.12
NetPot3_6: Pot3.6 R12a.1 | length 225.7
  Top Layer w30: Pot3.6@4336.61,1372.05 Pot3.6 4332.68,1379.92 R12a.1
NetPot4_1: Pot4.1 R16.2 U6.1 | length 715.5
  Top Layer w15: R16.2@5019.69,1476.38 5098.43,1555.12 5098.43,1673.23 5161.22,1736.02 U6.1
  Top Layer w30: R16.2@5019.69,1476.38 5019.69,1279.53 Pot4.1
NetPot4_2: Pot4.2 Pot4.3 R2.2 R3.1 U6.2 | length 1198.9
  Top Layer w15: U6.2 5261.22,1786.02 5295.28,1751.97 5295.28,1712.6 5275.59,1692.91 5177.17,1692.91 5137.8,1653.54 5137.8,1535.43 5196.85,1476.38 R3.1@5295.28,1476.38
  Top Layer w30: R3.1 R2.2 ; Pot4.2 5393.7,1181.1 ; R2.2@5393.7,1476.38 5393.7,1181.1 ; Pot4.3 5393.7,1181.1
NetR8_1: R8.1 R13.1 U4.6 | length 1718.1
  Top Layer w15: U4.6 1451.38,2210.04 1496.06,2165.35 v1(1496.06,2007.87) 1496.06,1968.5 1476.38,1948.82 R8.1@1476.38,1895.67
  Top Layer w30: v1(2440.94,1397.64) 2555.12,1397.64 R13.1
  Bottom Layer w30: v1(1496.06,2007.87) 1562.99,1940.94 1582.68,1940.94 1605.67,1917.95 1642.55,1917.95 2004.76,1555.75 2282.83,1555.75 v1(2440.94,1397.64)
NetR8a_1: R8a.1 R13a.1 U4.2 | length 1387.8
  Top Layer w15: U4.2 1658.86,2160.04 v1(1712.6,2106.3) R8a.1@1712.6,1895.67
  Top Layer w30: v1(2185.04,1673.23) 2322.83,1673.23 2362.2,1712.6 R13a.1
  Bottom Layer w30: v1(1712.6,2106.3) 1712.6,2007.87 2047.24,1673.23 v1(2185.04,1673.23)
NetR14_1: R14.1 R15.2 U5.6 | length 462.7
  Top Layer w15: U5.6 4010.43,1993.5 4074.8,1929.13 4074.8,1770.67 ; R14.1@4035.43,1685.04 4035.43,1704.72 4074.8,1744.09 4074.8,1770.67 ; R15.2@4145.67,1771.65 R15.2 4075.79,1771.65 4074.8,1770.67
NetR14a_1: R14a.1 R15a.2 U5.2 | length 541.4
  Top Layer w15: R14a.1@4133.86,1685.04 4141.73,1677.17 4181.1,1677.17 4212.6,1708.66 4212.6,1771.65 ; U5.2 4128.54,1943.5 4114.17,1929.13 4114.17,1850.39 4133.86,1830.71 4192.91,1830.71 4212.6,1811.02 4212.6,1771.65 ; R15a.2 4214.57,1773.62 4212.6,1771.65
NetR15_1: R15.1 R17.2 U5.7 | length 375.2
  Top Layer w15: U5.7 4001.38,1943.5 4039.37,1905.51 4039.37,1846.46 4023.62,1830.71 R15.1
  Top Layer w30: R17.2@3937.01,1685.04 3937.01,1732.28 3976.38,1771.65 R15.1
NetR15a_1: R15a.1 R17a.2 U5.1 | length 213
  Top Layer w15: U5.1 4182.87,1889.76 R15a.1@4291.34,1889.76
  Top Layer w30: R15a.1@4291.34,1889.76 4293.31,1891.73 R17a.2
NetR21_1: R21.1 R22.2 U7.2 | length 330
  Top Layer w30: R21.1 R22.2 2996.06,4318.9 U7.2
NetR21a_1: R21a.1 R22a.1 U7a.2 | length 308
  Top Layer w30: R21a.1 5976.38,4318.9 R22a.1@5980.31,4314.96 ; R22a.1 6185.04,4318.9 U7a.2
NetR21b_1: R21b.1 R22b.2 U7b.2 | length 322.2
  Top Layer w30: R21b.1 R22b.2@4401.57,4318.9 ; R22b.2 4610.23,4318.9 U7b.2

## Polygon pours and split planes (outlines as drawn)
GND on Top Layer "GND_TOP" (solid, remove dead copper, pour order 36): 2864.17,2362.2 2322.83,2362.2 2263.78,2421.26 2263.78,2942.91 1899.61,3307.09 999.55,3307.09 999.55,3409.94 1003.97,3405.51 2864.17,3405.51
GND on Top Layer "GND_TOP" (solid, remove dead copper, pour order 34): 984.25,3267.72 1771.65,3267.72 2211.61,2827.76 2211.61,2473.43 2322.83,2362.2 6899.61,2362.2 7076.77,2185.04 7086.61,2185.04 7086.61,1496.06 6535.43,944.88 984.25,944.88
GND on Top Layer "GND_Top" (solid, remove dead copper, pour order 14): 1850.39,3917.32 2558.92,4625.85 7086.61,4625.85 7086.61,1968.37 6919.16,1968.37 6594.36,2293.18 6240.29,2293.18 6171.26,2362.2 2864.17,2362.2 1919.29,3307.09 984.12,3307.09 984.12,3779.4 1122.05,3917.32
GND on Bottom Layer "GND_Bottom" (solid, remove dead copper, pour order 28): 984.09,3267.72 1830.55,3267.72 5413.23,3267.72 5539.21,3267.72 5873.86,3267.72 6889.61,3267.72 6889.61,1820.87 7086.46,1820.87 7086.46,1495.91 6535.43,944.88 984.09,944.88
GND on Bottom Layer "GND_Bottom" (solid, remove dead copper, pour order 24): 984.09,3267.72 984.09,3779.53 1121.89,3917.32 1850.39,3917.32 2559.05,4625.98 7086.46,4625.98 7086.46,1889.76 7076.61,1899.61 6909.29,1899.61 6594.33,2214.57 5541.18,3267.72

## Keep-outs
Keep-Out Layer:
  the board outline again, w10

## Other copper
Top Layer:
  pour cut-out: 6023.62,2372.05 6023.62,2263.78 5984.25,2263.78 5964.57,2283.46 5964.57,2391.73 6003.94,2391.73
  pour cut-out: 6210.63,2322.83 6210.63,2277.56 6187.01,2253.94 6082.68,2253.94 6082.68,2381.89 6151.57,2381.89
  pour cut-out: 6013.78,2362.2 6017.4,2358.58 6017.4,2275.75 5960.47,2275.75 5885.83,2350.39 5885.83,2381.89 6013.78,2381.89
  pour cut-out: 1161.42,2460.63 1889.76,2460.63 1771.65,2342.52 1161.42,2342.52
  pour cut-out: 1601.06,2235.04 1601.06,2185.04 1653.54,2185.04 1653.54,2224.41
  pour cut-out: 1496.06,2342.52 1338.58,2342.52 1338.58,2381.89 1496.06,2381.89
  pour cut-out: 1160.47,2451.26 1160.47,2363.15 1230.63,2433.31
  pour cut-out: 5248.03,1803.15 5370.08,1803.15 5413.39,1759.84 5413.39,1653.54 5401.57,1641.73 5251.97,1641.73 5248.03,1645.67
  pour cut-out: 1673.23,2913.39 1822.83,2913.39 1822.83,3086.61 1669.29,3086.61
  pour cut-out: 1488.19,1602.36 1515.75,1629.92 1566.93,1629.92 1566.93,1582.68 1512.8,1582.68
  pour cut-out: 1338.58,1866.14 1338.58,1740.16 1263.78,1740.16 1263.78,1866.14
  pour cut-out: 6092.83,2285.75 6072.83,2285.75 6072.83,2283.46 6092.83,2275.75
  pour cut-out: 6070.55,2285.75 6072.83,2283.46 6052.83,2275.75 6052.83,2285.75
  pour cut-out: 6035.12,2285.75 6037.4,2283.46 6017.4,2275.75 6017.4,2285.75
  pour cut-out: 5253.78,1494.22 5253.78,1580.81 5267.66,1566.93 5267.66,1507.93 5253.95,1494.22
  pour cut-out: 1514.95,2290.86 1642.22,2290.86 1665.69,2267.39 1665.69,2153.5
  pour cut-out: 1311.02,2267.72 1519.68,2267.72 1519.68,2318.9 1311.02,2318.9
  pour cut-out: 4122.05,2066.93 4228.35,2066.93 4228.35,2000 4122.05,2000
  pour cut-out: 4220.47,1901.25 4220.47,1960.63 4267.72,1960.63 4267.72,1901.25
  pour cut-out: 4232.06,1988.19 4232.45,1905.51 4177.17,1905.51 4177.17,1988.19
  pour cut-out: 3925.2,1909.45 3925.2,2033.5 3970.47,2033.5 3970.47,1911.42 3968.5,1909.45
  pour cut-out: 1411.73,2720.31 1464.25,2720.31 1464.25,2590.87 1468.5,2586.61 1460.63,2578.74 1405.51,2578.74 1405.51,2714.09
  pour cut-out: 4248.03,1984.25 4248.03,1956.69 4251.97,1952.76 4208.66,1952.76 4208.66,1980.32 4212.6,1984.25
  pour cut-out: 4341.02,2049.68 4359.76,2049.68 4359.76,2018.19 4362.2,2015.75 4334.65,2015.75 4334.65,2043.31
  pour cut-out: 4230.31,1984.25 4245.47,1999.41 4245.59,1999.41 4245.59,1986.69 4248.03,1984.25
  pour cut-out: 4470.95,1829.76 4470.95,1809.39 4469.31,1811.02 4429.13,1811.02 4429.13,1826.77 4440.94,1838.58 4468.5,1838.58 4468.5,1832.21
  pour cut-out: 4195.35,1629.45 4195.35,1610.71 4160.94,1610.71 4145.67,1625.98 4149.13,1629.45
  pour cut-out: 3777.08,1630.12 3777.08,1606.9 3781.62,1602.36 3814.96,1602.36 3814.96,1633.86 3811.22,1630.12
  pour cut-out: 3777.08,1750.12 3777.08,1762.29 3645.67,1893.7 3645.67,1956.69 3708.66,2019.68 3929.13,2019.68 3929.13,1936.75 3996.06,1869.82 3996.06,1814.96 3968.5,1814.96 3885.83,1732.28 3867.99,1750.12
  pour cut-out: 2549.68,1774.09 2568.43,1774.09 2568.43,1750 2537.4,1750 2535.43,1751.97 2549.68,1766.22

## Silkscreen, mask and mechanical layers (free items; w line width, h text height)
Top Overlay:
  text "IN_R" at 1090.55,3110.24 h30 r270
  text "GND" at 1090.55,2976.38 h30 r270
  text "GND" at 1094.49,2850.39 h30 r270
  text "IN_L" at 1094.49,2704.72 h30 r270
  text "+VCC" at 6791.34,1712.6 h30 r90
  text "GND" at 6791.34,1594.49 h30 r90
  text "Bartosz Ostrowski" at 7047.24,1574.8 h30 r90
  text "-VCC" at 6791.34,1437.01 h30 r90